# EAGLE board elysium_v0_5 (EAGLE 6.5.0)
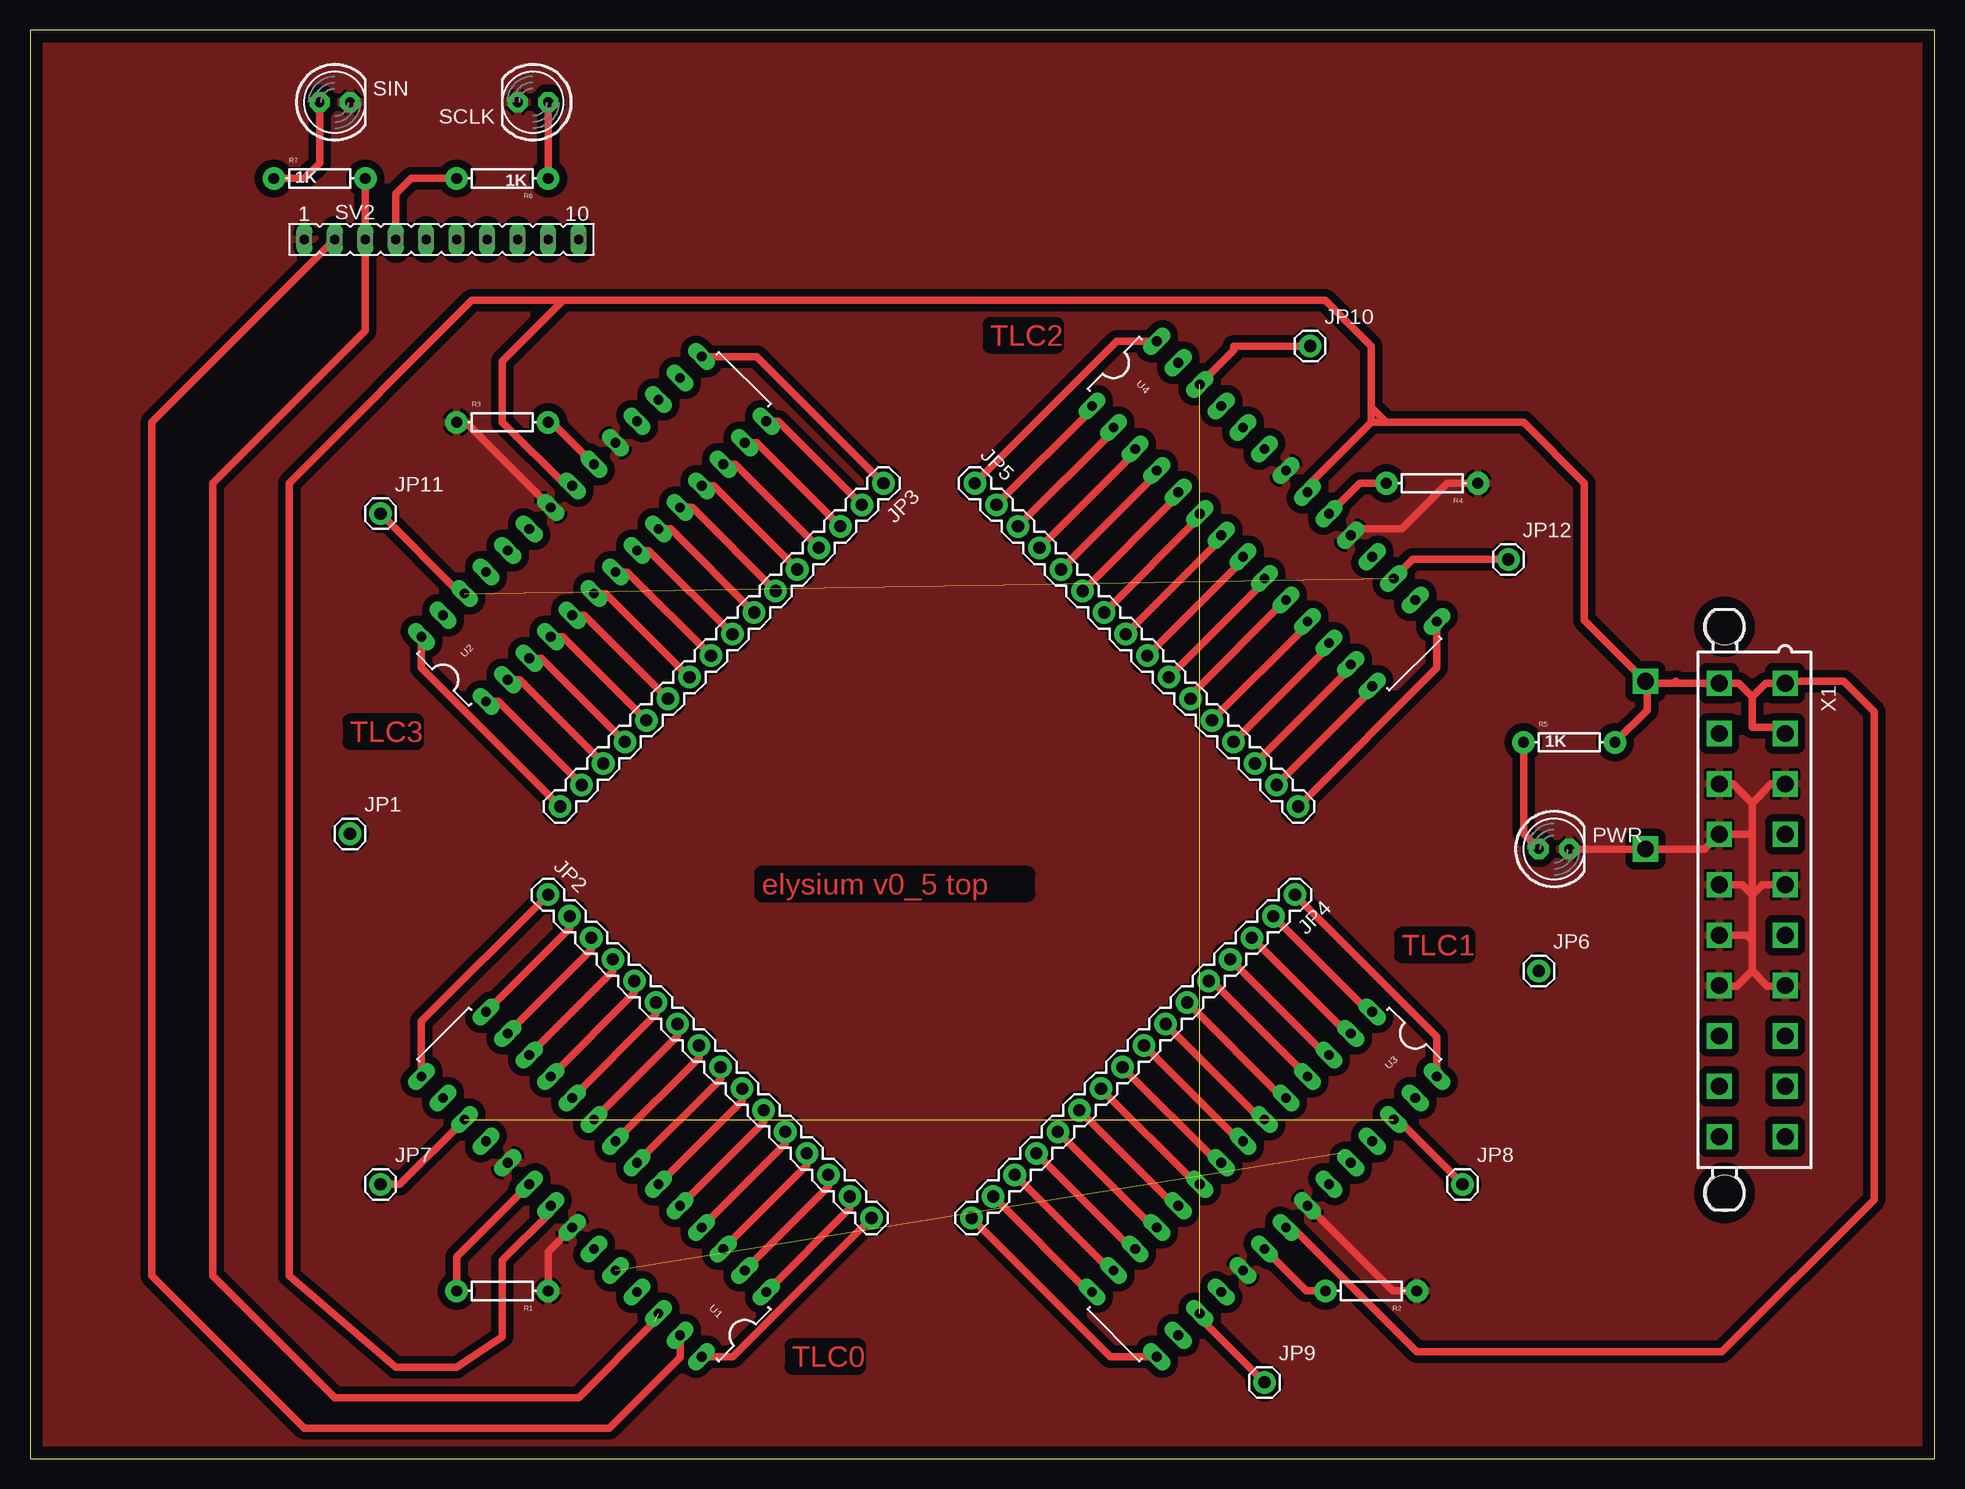
[diagram p0: board, top side]
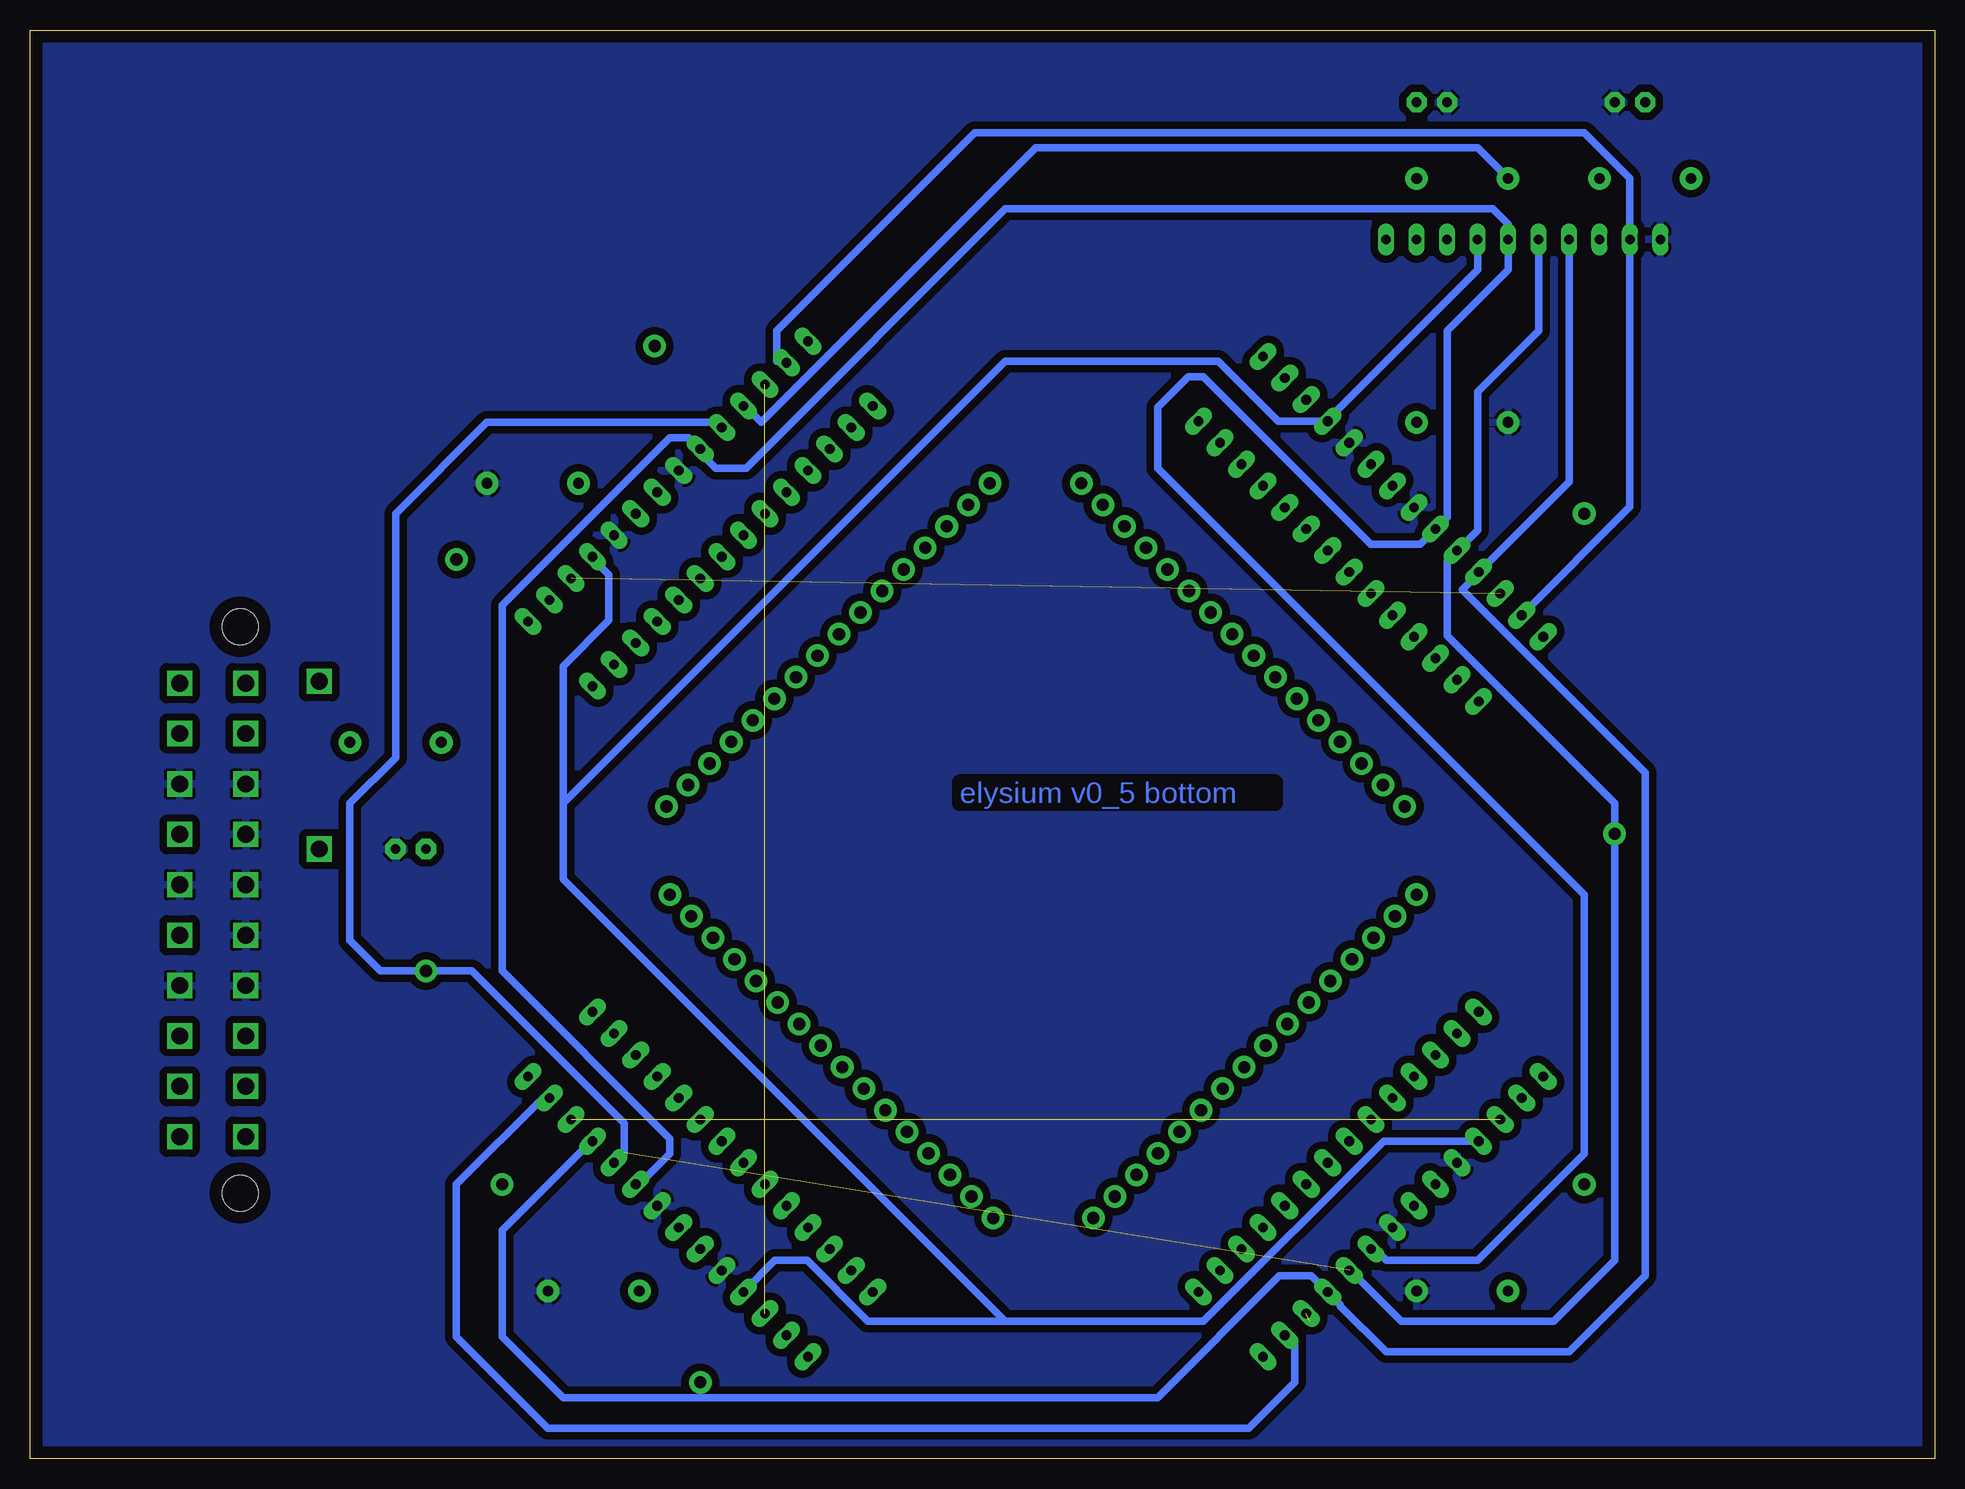
[diagram p1: board, bottom side, seen from below]

Size 158.73 x 119.05 mm. Coordinates in mm from the lower left corner, seen from the top.
Outline: 0,0 158.73,0 158.73,119.05 0,119.05 0,0
Copper layers (1*16): Top 0.035mm / dielectric 1.5mm / Bottom 0.035mm
Design rules "default *": minimum track width 10mil, minimum drill 24mil, track to track 25mil, track to pad 25mil, pad to pad 25mil, via to via 25mil, smd to smd 8mil, copper to edge 40mil, drill to drill 8mil, minimum pad ring 10mil, minimum via ring 8mil, stop-mask expansion 4mil, vias tented up to drill 0mil, thermal gap 10mil

## Footprints (pad centres in the part's own frame; a part is rotated, then mirrored left to right if it is on the bottom)
1X01 = drill 1.016 pad 1.88: 1 0,0
1X16 = drill 1.016 pad 1.88: 1 0,0; 2 2.54,0; 3 5.08,0; 4 7.62,0; 5 10.16,0; 6 12.7,0; 7 15.24,0; 8 17.78,0; 9 20.32,0; 10 22.86,0; 11 25.4,0; 12 27.94,0; 13 30.48,0; 14 33.02,0; 15 35.56,0; 16 38.1,0
LED5MM = drill 0.813 pad 1.676 octagon: A -1.27,0; K 1.27,0
AXIAL-0.3EZ = drill 0.9 pad 1.88: P$1 -3.81,0; P$2 3.81,0
FE10 = drill 0.813 long: 1 -11.43,0; 2 -8.89,0; 3 -6.35,0; 4 -3.81,0; 5 -1.27,0; 6 1.27,0; 7 3.81,0; 8 6.35,0; 9 8.89,0; 10 11.43,0
DIL28-3 = drill 0.813 long: 1 -16.51,-3.81; 2 -13.97,-3.81; 3 -11.43,-3.81; 4 -8.89,-3.81; 5 -6.35,-3.81; 6 -3.81,-3.81; 7 -1.27,-3.81; 8 1.27,-3.81; 9 3.81,-3.81; 10 6.35,-3.81; 11 8.89,-3.81; 12 11.43,-3.81; 13 13.97,-3.81; 14 16.51,-3.81; 15 16.51,3.81; 16 13.97,3.81; 17 11.43,3.81; 18 8.89,3.81; 19 6.35,3.81; 20 3.81,3.81; 21 1.27,3.81; 22 -1.27,3.81; 23 -3.81,3.81; 24 -6.35,3.81; 25 -8.89,3.81; 26 -11.43,3.81; 27 -13.97,3.81; 28 -16.51,3.81
5566-20 = drill 1.4 square: 1 18.9,-2.75; 2 14.7,-2.75; 3 10.5,-2.75; 4 6.3,-2.75; 5 2.1,-2.75; 6 -2.1,-2.75; 7 -6.3,-2.75; 8 -10.5,-2.75; 9 -14.7,-2.75; 10 -18.9,-2.75; 11 18.9,2.75; 12 14.7,2.75; 13 10.5,2.75; 14 6.3,2.75; 15 2.1,2.75; 16 -2.1,2.75; 17 -6.3,2.75; 18 -10.5,2.75; 19 -14.7,2.75; 20 -18.9,2.75 | hole 3: 23.6,2.29; -23.6,2.29

## Placement (x,y rotation side)
JP1  M01PTH  [1X01]  26.67,52.07 0 top
JP2  M16PTH  [1X16]  43.18,46.99 315 top
JP3  M16PTH  [1X16]  71.12,81.28 225 top
JP4  M16PTH  [1X16]  105.41,46.99 225 top
JP5  M16PTH  [1X16]  78.74,81.28 315 top
JP6  M01PTH  [1X01]  125.73,40.64 0 top
JP7  M01PTH  [1X01]  29.21,22.86 0 top
JP8  M01PTH  [1X01]  119.38,22.86 0 top
JP9  M01PTH  [1X01]  102.87,6.35 0 top
JP10  M01PTH  [1X01]  106.68,92.71 0 top
JP11  M01PTH  [1X01]  29.21,78.74 0 top
JP12  M01PTH  [1X01]  123.19,74.93 0 top
PWR  [LED5MM]  127,50.8 0 top
R1  [AXIAL-0.3EZ]  39.37,13.97 180 top
R2  [AXIAL-0.3EZ]  111.76,13.97 180 top
R3  [AXIAL-0.3EZ]  39.37,86.36 0 top
R4  [AXIAL-0.3EZ]  116.84,81.28 180 top
R5  1K  [AXIAL-0.3EZ]  128.27,59.69 0 top
R6  1K  [AXIAL-0.3EZ]  39.37,106.68 180 top
R7  1K  [AXIAL-0.3EZ]  24.13,106.68 0 top
SCLK  [LED5MM]  41.91,113.03 180 top
SIN  [LED5MM]  25.4,113.03 0 top
SV2  [FE10]  34.29,101.6 0 top
U1  TLC5940-NT  [DIL28-3]  46.99,22.86 135 top
U2  TLC5940-NT  [DIL28-3]  46.99,77.47 45 top
U3  TLC5940-NT  [DIL28-3]  102.87,22.86 225 top
U4  TLC5940-NT  [DIL28-3]  102.87,78.74 315 top
X1  5566-20  [5566-20]  143.51,45.72 90 top

## Library data of the parts
JP1-JP12 = SparkFun-Connectors
PWR SCLK SIN = adafruit
R1-R7 = SparkFun-Resistors
SV2 = con-lsta; OC_FARNELL: unknown; OC_NEWARK: unknown
U1-U4 = SparkFun-DigitalIC
X1 = con-molex; OC_FARNELL: unknown; OC_NEWARK: unknown

## Nets
BLANK: SV2.6 U1.23 U2.23 U3.23 U4.23
GND: PWR.K R1.P$1 R2.P$1 R3.P$1 R4.P$1 SCLK.K SIN.K SV2.1 U1.19 U1.22 U2.19 U2.22 U3.19 U3.22 U4.19 U4.22 X1.3 X1.5 X1.7 X1.13 X1.14 X1.15 X1.16 X1.17
GSCLK: SV2.7 U1.18 U2.18 U3.18 U4.18
N$1: JP2.16 U1.28
N$2: JP2.15 U1.1
N$3: JP2.14 U1.2
N$4: JP2.13 U1.3
N$5: JP2.12 U1.4
N$6: JP2.11 U1.5
N$7: JP2.10 U1.6
N$8: JP2.9 U1.7
N$9: JP2.8 U1.8
N$10: JP2.7 U1.9
N$11: JP2.6 U1.10
N$12: JP2.5 U1.11
N$13: JP2.4 U1.12
N$14: JP2.3 U1.13
N$15: JP2.2 U1.14
N$16: JP2.1 U1.15
N$17: JP4.1 U3.28
N$18: JP4.2 U3.1
N$19: JP4.3 U3.2
N$20: JP4.4 U3.3
N$21: JP4.5 U3.4
N$22: JP4.6 U3.5
N$23: JP4.7 U3.6
N$24: JP4.8 U3.7
N$25: JP4.9 U3.8
N$26: JP4.10 U3.9
N$27: JP4.11 U3.10
N$28: JP4.12 U3.11
N$29: JP4.13 U3.12
N$30: JP4.14 U3.13
N$31: JP4.15 U3.14
N$32: JP4.16 U3.15
N$33: JP3.16 U2.28
N$34: JP3.15 U2.1
N$35: JP3.14 U2.2
N$36: JP3.13 U2.3
N$37: JP3.12 U2.4
N$38: JP3.11 U2.5
N$39: JP3.10 U2.6
N$40: JP3.9 U2.7
N$41: JP3.8 U2.8
N$42: JP3.7 U2.9
N$43: JP3.6 U2.10
N$44: JP3.5 U2.11
N$45: JP3.4 U2.12
N$46: JP3.3 U2.13
N$47: JP3.2 U2.14
N$48: JP3.1 U2.15
N$49: JP5.1 U4.28
N$50: JP5.2 U4.1
N$51: JP5.3 U4.2
N$52: JP5.4 U4.3
N$53: JP5.5 U4.4
N$54: JP5.6 U4.5
N$55: JP5.7 U4.6
N$56: JP5.8 U4.7
N$57: JP5.9 U4.8
N$58: JP5.10 U4.9
N$59: JP5.11 U4.10
N$60: JP5.12 U4.11
N$61: JP5.13 U4.12
N$62: JP5.14 U4.13
N$63: JP5.15 U4.14
N$64: JP5.16 U4.15
N$65: JP7.1 JP8.1 U1.17 U3.26
N$66: JP9.1 JP10.1 U3.17 U4.26
N$67: JP11.1 JP12.1 U2.26 U4.17
N$68: R1.P$2 U1.20
N$69: PWR.A R5.P$1
N$70: R2.P$2 U3.20
N$74: R6.P$1 SCLK.A
N$75: R3.P$2 U2.20
N$76: R7.P$1 SIN.A
N$77: R4.P$2 U4.20
SCLK: R6.P$2 SV2.4 U1.25 U2.25 U3.25 U4.25
SIN: R7.P$2 SV2.3 U1.26
VCC: R5.P$2 U1.21 U2.21 U3.21 U4.21 X1.1 X1.2 X1.11
VPRG: SV2.2 U1.27 U2.27 U3.27 U4.27
XLAT: JP1.1 JP6.1 SV2.5 U1.24 U2.24 U3.24 U4.24

## Tracks (layer width: path | path; a pad name or v marks a point on that pad's centre or on a via)
BLANK
  Bottom 0.61: U3.23 107.95,22.86 105.41,25.4 105.41,26.67 119.38,40.64 119.38,71.12 105.41,85.09 103.83,85.09 U4.23 102.87,83.82 101.6,82.55 99.06,82.55 77.47,104.14 36.83,104.14 35.56,102.87 SV2.6 35.56,99.06 40.64,93.98 40.64,78.43 U2.23 42.87,76.2 46.99,76.2 60.96,90.17 62.23,90.17 64.77,87.63 64.77,82.55 29.21,46.99 29.21,25.4 38.1,16.51 45.72,16.51 46.68,17.47 U1.23
GND
  Top 0.61: R1.P$1 43.18,17.25 U1.22 | R2.P$1 113.56,13.97 U3.22 | X1.13 141.9,56.22 143.51,54.61 | 143.51,54.61 143.51,52.07 | 143.51,52.07 143.51,46.99 | 143.51,46.99 143.51,43.18 | 143.51,43.18 143.51,40.64 | 143.51,40.64 142.24,39.37 140.81,39.37 X1.17 | 143.51,40.64 144.78,39.37 146.21,39.37 X1.7 | X1.16 143.07,43.62 143.51,43.18 | X1.5 144.34,47.82 143.51,46.99 | X1.15 142.68,47.82 143.51,46.99 | 143.51,52.07 143.46,52.02 X1.14 139.54,50.8 PWR.K | X1.3 145.12,56.22 143.51,54.61 | R4.P$1 118.11,81.28 114.3,77.47 110.58,77.47 U4.19 | R3.P$1 36.3,86.36 U2.22
  pour Bottom: -6.35,121.92 -6.35,-7.62 163.83,-7.62 163.83,5.08 163.83,121.92
  pour Top: -11.43,124.46 -11.43,-12.7 167.64,-12.7 167.64,124.46
GSCLK
  Bottom 0.61: U1.18 45.94,26.45 60.96,11.43 77.47,11.43 | 77.47,11.43 88.9,11.43 93.98,16.51 96.65,16.51 U3.18 | SV2.7 38.1,99.06 50.58,86.58 U2.18 54.7,86.45 59.69,91.44 77.47,91.44 114.3,54.61 | U4.18 111.85,75.02 110.49,73.66 110.49,69.85 114.3,66.04 114.3,54.61 | 114.3,54.61 114.3,48.26 77.47,11.43
N$1
  Top 0.61: U1.28 58.56,8.49 JP2.16
N$2
  Top 0.61: JP2.15 68.33,20.85 U1.1
N$3
  Top 0.61: JP2.14 66.53,22.64 U1.2
N$4
  Top 0.61: JP2.13 64.73,24.44 U1.3
N$5
  Top 0.61: JP2.12 62.94,26.23 U1.4
N$6
  Top 0.61: JP2.11 61.14,28.03 U1.5
N$7
  Top 0.61: JP2.10 59.34,29.83 U1.6
N$8
  Top 0.61: JP2.9 57.55,31.62 U1.7
N$9
  Top 0.61: JP2.8 55.75,33.42 U1.8
N$10
  Top 0.61: JP2.7 53.96,35.21 U1.9
N$11
  Top 0.61: JP2.6 52.16,37.01 U1.10
N$12
  Top 0.61: JP2.5 50.36,38.81 U1.11
N$13
  Top 0.61: JP2.4 48.57,40.6 U1.12
N$14
  Top 0.61: JP2.3 46.77,42.4 U1.13
N$15
  Top 0.61: JP2.2 44.98,44.2 U1.14
N$16
  Top 0.61: U1.15 32.62,36.43 JP2.1
N$17
  Top 0.61: U3.28 117.24,35.16 JP4.1
N$18
  Top 0.61: U3.1 111.58,37.23 JP4.2
N$19
  Top 0.61: U3.2 109.78,35.43 JP4.3
N$20
  Top 0.61: U3.3 107.99,33.64 JP4.4
N$21
  Top 0.61: JP4.5 98.5,39.81 U3.4
N$22
  Top 0.61: U3.5 104.4,30.04 JP4.6
N$23
  Top 0.61: U3.6 102.6,28.25 JP4.7
N$24
  Top 0.61: U3.7 100.8,26.45 JP4.8
N$25
  Top 0.61: U3.8 99.01,24.66 JP4.9
N$26
  Top 0.61: U3.9 97.21,22.86 JP4.10
N$27
  Top 0.61: U3.10 95.42,21.06 JP4.11
N$28
  Top 0.61: U3.11 93.62,19.27 JP4.12
N$29
  Top 0.61: U3.12 91.82,17.47 JP4.13
N$30
  Top 0.61: U3.13 90.03,15.68 JP4.14
N$31
  Top 0.61: U3.14 88.23,13.88 JP4.15
N$32
  Top 0.61: U3.15 90.03,8.49 JP4.16
N$33
  Top 0.61: U2.28 32.62,65.9 JP3.16
N$34
  Top 0.61: U2.1 39.01,63.1 JP3.15
N$35
  Top 0.61: U2.2 40.8,64.9 JP3.14
N$36
  Top 0.61: U2.3 42.6,66.69 JP3.13
N$37
  Top 0.61: U2.4 44.4,68.49 JP3.12
N$38
  Top 0.61: U2.5 46.19,70.29 JP3.11
N$39
  Top 0.61: U2.6 47.99,72.08 JP3.10
N$40
  Top 0.61: U2.7 49.78,73.88 JP3.9
N$41
  Top 0.61: U2.8 51.58,75.67 JP3.8
N$42
  Top 0.61: U2.9 53.38,77.47 JP3.7
N$43
  Top 0.61: U2.10 55.17,79.27 JP3.6
N$44
  Top 0.61: U2.11 56.97,81.06 JP3.5
N$45
  Top 0.61: U2.12 58.77,82.86 JP3.4
N$46
  Top 0.61: U2.13 60.56,84.65 JP3.3
N$47
  Top 0.61: U2.14 62.36,86.45 JP3.2
N$48
  Top 0.61: U2.15 60.56,91.84 JP3.1
N$49
  Top 0.61: U4.28 90.57,93.11 JP5.1
N$50
  Top 0.61: U4.1 88.5,87.45 JP5.2
N$51
  Top 0.61: U4.2 90.3,85.65 JP5.3
N$52
  Top 0.61: U4.3 92.09,83.86 JP5.4
N$53
  Top 0.61: U4.4 93.89,82.06 JP5.5
N$54
  Top 0.61: U4.5 95.69,80.27 JP5.6
N$55
  Top 0.61: U4.6 97.48,78.47 JP5.7
N$56
  Top 0.61: U4.7 99.28,76.67 JP5.8
N$57
  Top 0.61: U4.8 101.07,74.88 JP5.9
N$58
  Top 0.61: U4.9 102.87,73.08 JP5.10
N$59
  Top 0.61: JP5.11 96.7,63.59 U4.10
N$60
  Top 0.61: U4.11 106.46,69.49 JP5.12
N$61
  Top 0.61: U4.12 108.26,67.69 JP5.13
N$62
  Top 0.61: U4.13 110.05,65.9 JP5.14
N$63
  Top 0.61: U4.14 111.85,64.1 JP5.15
N$64
  Top 0.61: U4.15 117.24,65.9 JP5.16
N$65  (1 unrouted)
  Top 0.61: JP7.1 30.83,22.86 U1.17 | JP8.1 114.3,27.94 113.95,27.94 U3.26
N$66  (1 unrouted)
  Top 0.61: JP10.1 100.33,92.71 100.33,92.36 U4.26 | U3.17 97.48,11.74 JP9.1
N$67  (1 unrouted)
  Top 0.61: U2.26 35.87,72.08 JP11.1 | JP12.1 115.22,74.93 U4.17
N$68
  Top 0.61: R1.P$2 35.56,16.82 U1.20
N$69
  Top 0.61: R5.P$1 124.46,52.07 PWR.A
N$70
  Top 0.61: R2.P$2 106.37,13.97 U3.20
N$71  (via drill 1.4)
  other vias: 134.62,64.77
N$72  (via drill 1.4)
  other vias: 134.62,50.8
N$74
  Top 0.61: SCLK.A R6.P$1
N$75
  Top 0.61: R3.P$2 43.49,86.36 U2.20
N$76
  Top 0.61: R7.P$1 22.86,106.68 24.13,107.95 SIN.A
N$77
  Top 0.61: R4.P$2 110.8,81.28 U4.20
SCLK
  Top 0.61: R6.P$2 31.75,106.68 30.48,105.41 SV2.4
  Bottom 0.61: U4.25 99.15,87.72 97.79,86.36 74.93,109.22 38.1,109.22 R6.P$2 | SV2.4 30.48,81.41 U2.25 38.01,73.75 39.37,72.39 24.13,57.15 24.13,15.24 30.48,8.89 45.72,8.89 49.53,12.7 49.53,12.83 U1.25 51.94,15.24 54.61,15.24 64.77,5.08 114.3,5.08 119.38,10.16 119.38,19.05 111.98,26.45 U3.25
SIN  (1 unrouted)
  Top 0.61: R7.P$2 SV2.3 27.94,93.98 15.24,81.28 15.24,15.24 25.4,5.08 45.72,5.08 52.07,11.43
VCC
  Top 0.61: 143.51,63.5 142.39,64.62 X1.11 137.01,64.62 | 143.51,63.5 143.51,60.96 145.72,60.96 X1.2 | 143.51,63.5 144.63,64.62 X1.1 146.41,64.77 151.13,64.77 153.67,62.23 153.67,21.59 140.97,8.89 115.57,8.89 105.19,19.27 U3.21 | U4.21 106.46,81.06 111.76,86.36 | 111.76,86.36 113.03,86.36 | 113.03,86.36 124.46,86.36 129.54,81.28 129.54,69.85 134.77,64.62 | 137.01,64.62 137.16,64.77 | U2.21 44.67,81.06 39.37,86.36 39.37,91.44 44.45,96.52 | 44.45,96.52 107.95,96.52 111.76,92.71 111.76,87.63 | U1.21 43.4,20.54 39.37,16.51 39.37,10.16 35.56,7.62 30.48,7.62 21.59,15.24 21.59,81.28 36.83,96.52 44.45,96.52 | 137.01,64.62 134.77,64.62 | 134.77,64.62 134.77,62.38 R5.P$2 | 111.76,86.36 111.76,87.63 | 111.76,87.63 113.03,86.36
VPRG
  Top 0.61: U1.27 54.17,8.45 48.26,2.54 22.86,2.54 10.16,15.24 10.16,86.36 SV2.2
  Bottom 0.61: U4.27 95.81,91.44 96.52,91.44 96.52,93.98 80.01,110.49 29.21,110.49 25.4,106.68 SV2.2 25.4,79.3 U2.27 | U3.27 116.01,30.04 123.19,22.86 123.19,10.16 115.57,2.54 57.15,2.54 53.34,6.35 53.34,9.45 U1.27
XLAT  (1 unrouted)
  Bottom 0.61: SV2.5 33.02,93.98 38.1,88.9 38.1,77.38 U2.24 40.64,74.84 40.64,68.58 26.67,54.61 JP1.1 26.67,16.51 31.75,11.43 44.45,11.43 48.7,15.68 U1.24 | U3.24 109.22,25.49 109.22,27.94 121.92,40.64 JP6.1 129.54,40.64 132.08,43.18 132.08,54.61 128.27,58.42 128.27,78.74 120.65,86.36 101.51,86.36 U4.24

## Text on the board
Top: TLC2 | TLC3 | elysium v0_5 top | TLC1 | TLC0
Bottom: elysium v0_5 bottom